# Altium PCB Nixie_clocks_Controls_board.PcbDoc
Units mm, origin at the board's own origin, x right, y up, seen from the top; angles counter-clockwise.
Board outline 65 x 50 mm, 2 copper layers (Top Layer, Bottom Layer), stack 1.671 mm thick; 12 components, 28 nets, 95 pads, 0 vias.
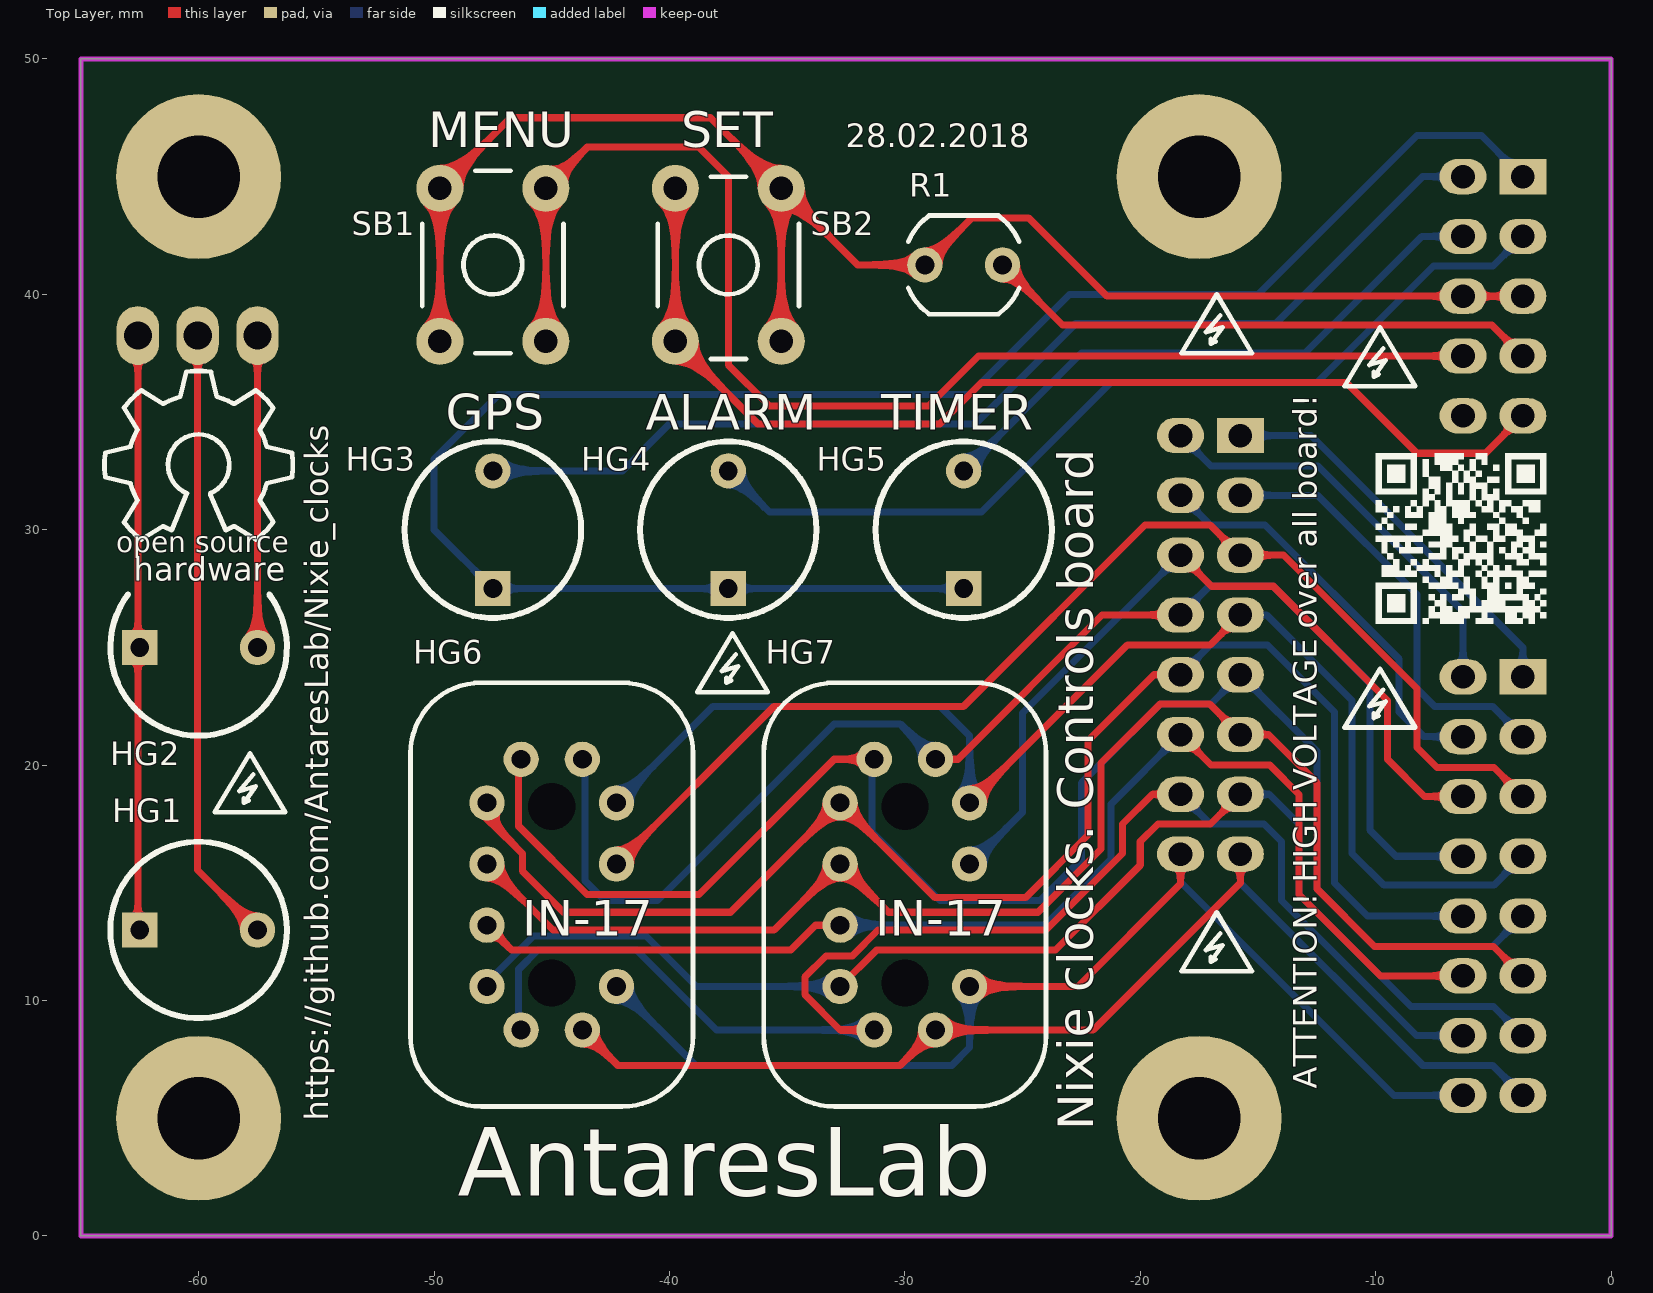
[diagram p0: Top Layer view]
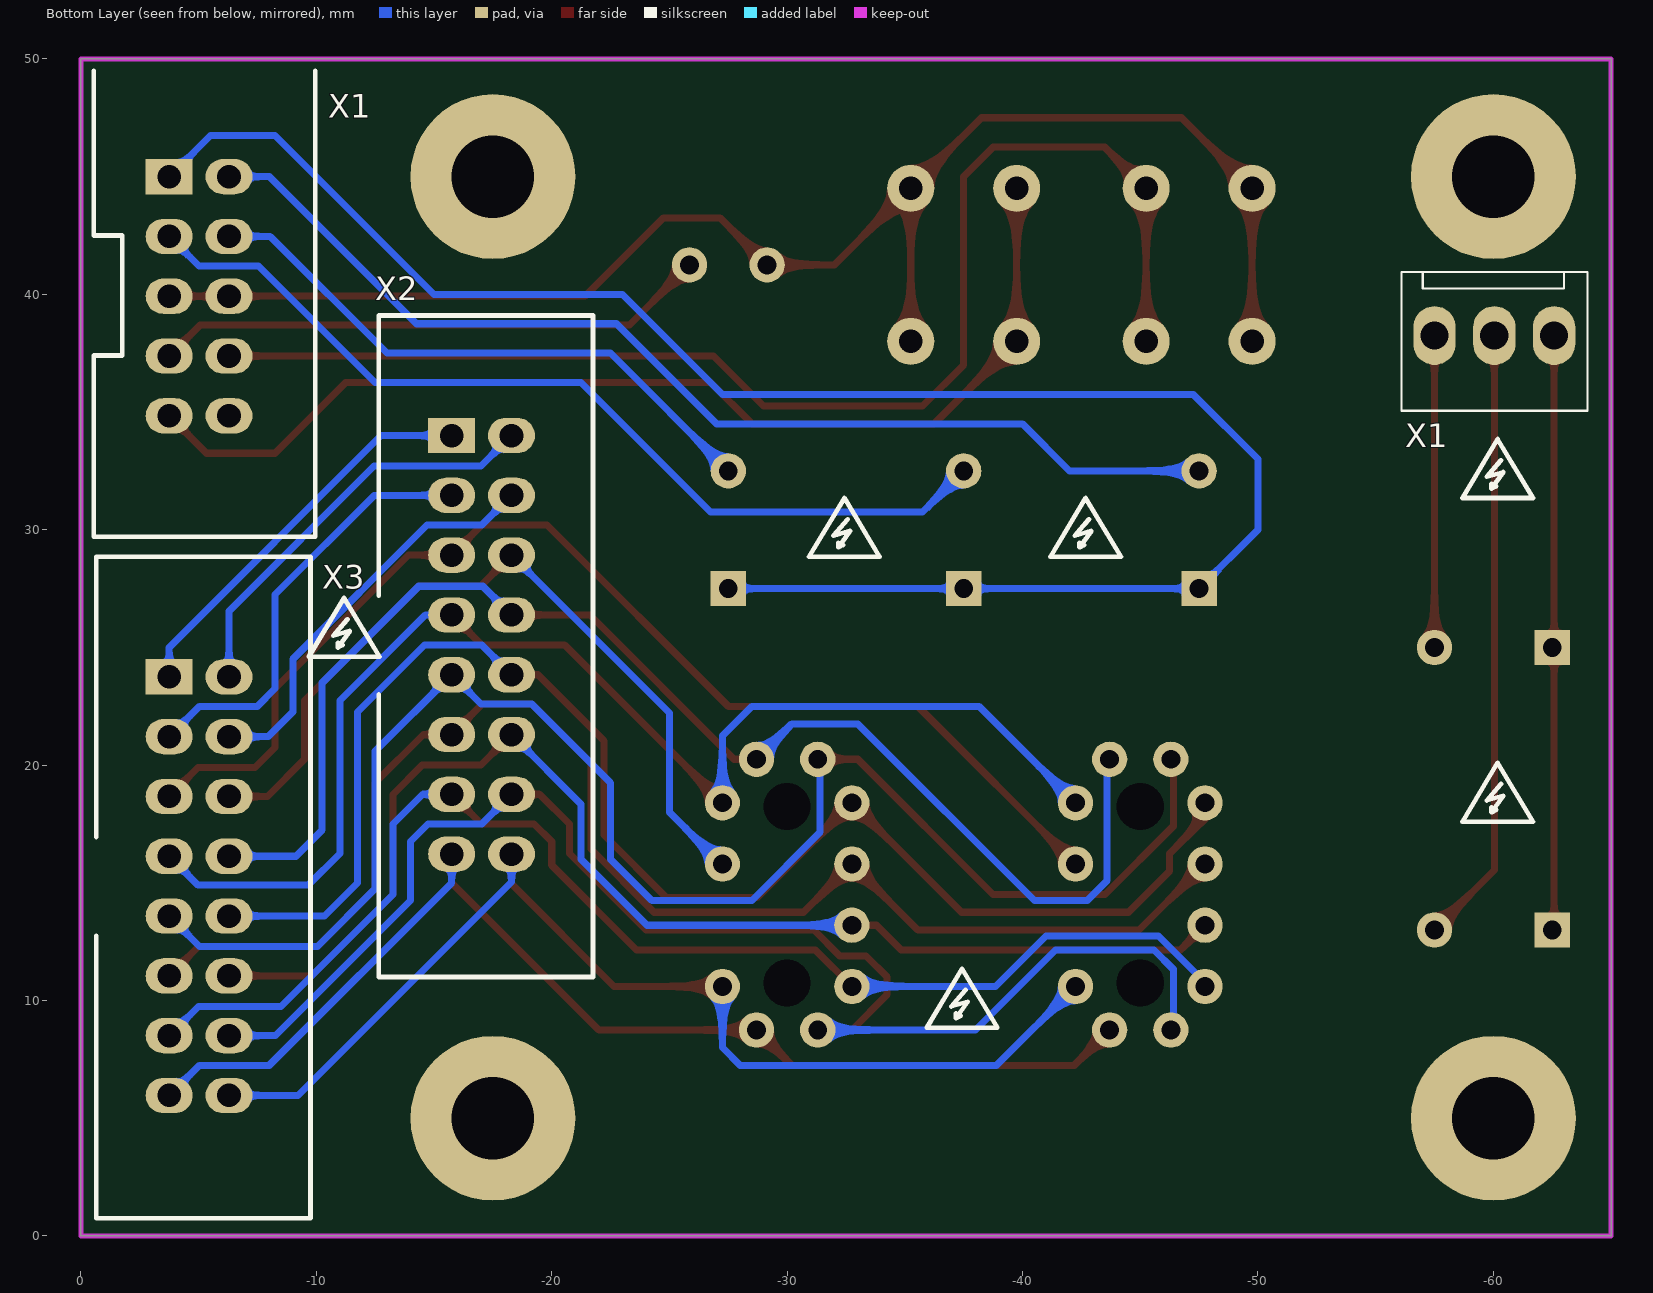
[diagram p1: Bottom Layer view, seen from below]
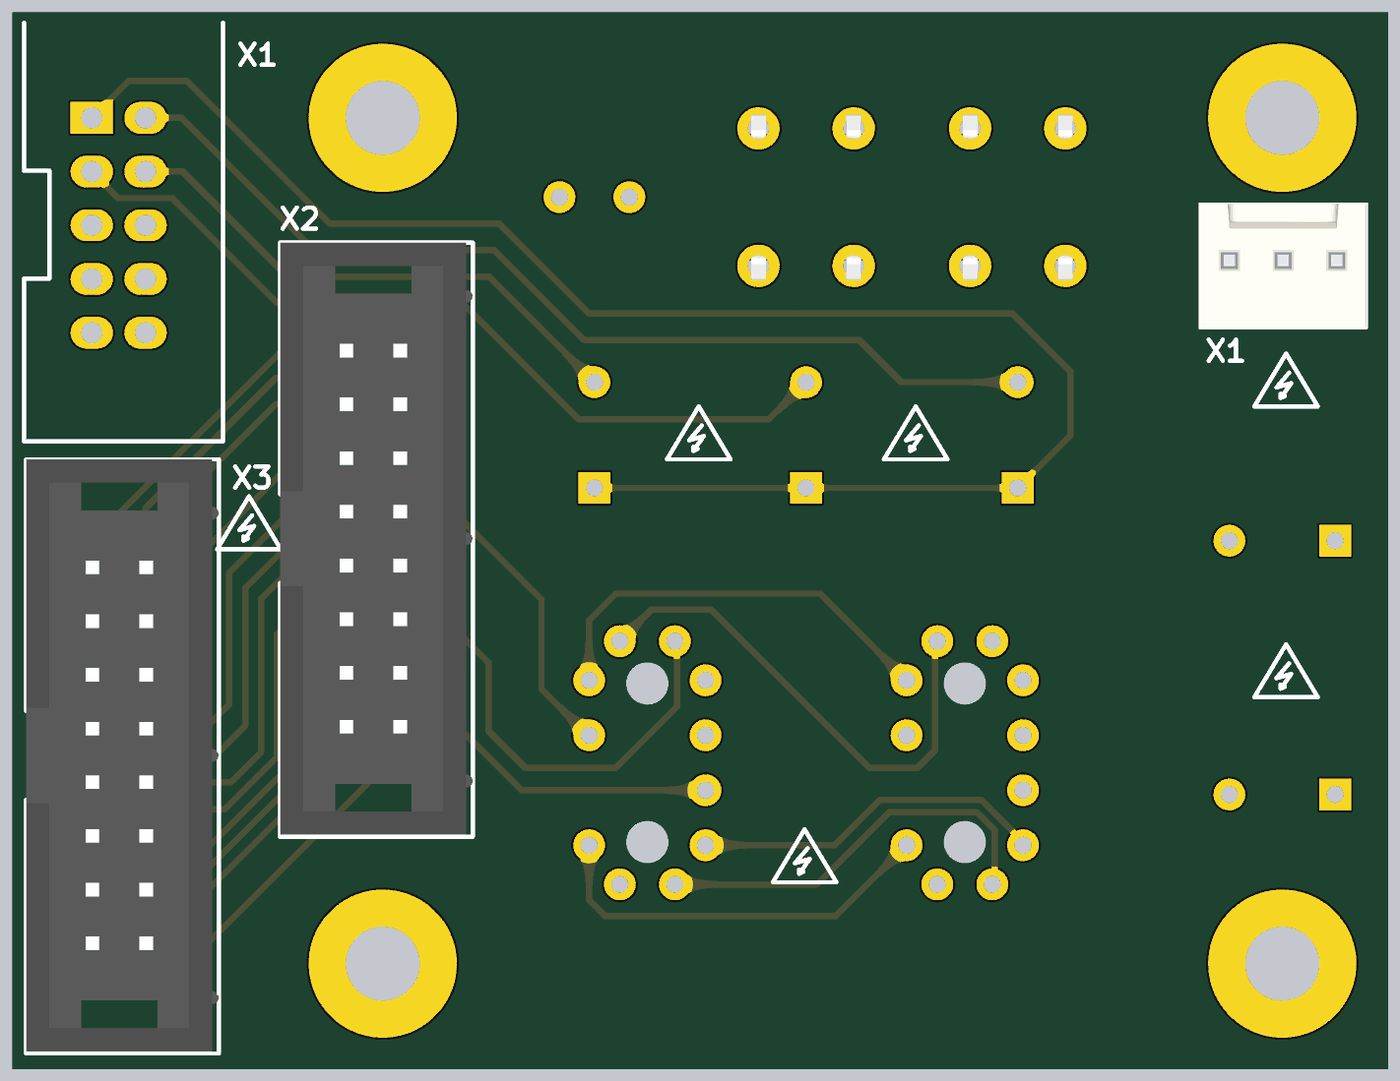
[diagram p2: 3D render of the assembled board from below, using the file's embedded part models]

## Layer stack, top to bottom
Top Solder: solder mask 0.0102, Solder Resist, Dk 3.5
Top Layer: signal copper 0.0356
Dielectric 1: dielectric 1.6, FR-4, Dk 4.8
Bottom Layer: signal copper 0.0356
Bottom Solder: solder mask 0.0102, Solder Resist, Dk 3.5

## Board outline
-65,0 0,0 0,50 -65,50

## Design rules (kind name [scope] priority, off if disabled: settings)
Clearance [All] p1: gap=0.254 ignorepadtopadclearanceinfootprint=FALSE except(0: Arc-Hole Track-Hole SMDPad-Hole THPad-Hole Via-Hole Fill-Hole Poly-Hole Region-Hole Text-Hole)
Height [All] p1: minheight=0 maxheight=30 prefheight=12.7
PolygonConnect [All] p1: connectstyle=Relief reliefconductorwidth=0.254 reliefentries=4 polygonreliefangle="90 Angle" airgapwidth=0.254
RoutingVias [All] p1: holewidth=0.711 width=1.27 viastyle="Through Hole" minholewidth=0.711 minwidth=1.27 maxholewidth=0.711 maxwidth=1.27
SolderMaskExpansion [All] p1: expansion=0.102
Width [All] p1: maxlimit=1 minlimit=0.254 preferedwidth=0.254
29 further rules are at their usual default settings.

## Components (designator, comment, footprint, x,y, rotation, side; value= is the part's Value field where it differs from the comment)
HG1 "INS-1" INS-1 -60,13 r90 top
HG3 "INS-1" INS-1 -47.5,30 r180 top
HG4 "INS-1" INS-1 -37.5,30 r180 top
HG5 "INS-1" INS-1 -27.5,30 r180 top
HG6 "IN-17" IN-17_socket -45,14.5 r0 top
HG7 "IN-17" IN-17_socket -30,14.5 r0 top
R1 "A9950" A99 -27.5,41.25 r180 top
SB1 "SPST_button" TACT-69N-F -47.5,41.25 r90 top
SB2 "SPST_button" TACT-69N-F -37.5,41.25 r270 top
X1 "Points 1" WF-3 -57.5,38.25 r180 bottom
X2 "Tubes" IDC16 -15.75,34 r270 bottom
X3 "Tubes" IDC16 -3.75,23.75 r270 bottom

## Footprints (in the part's own frame and the unit in brackets; to place one, negate y for a bottom-side part, rotate by r counter-clockwise, add the part's x,y. Pads: shape width x height; smd on the part's side, far side on the other; paste and mask are expansions set on the pad)
A99 [mm]
  round 1.5 hole 0.8: 1(-1.65,0) 2(1.65,0)
  silkscreen extent -2.35,-2.1 2.35,2.1, body extent -2.5,-2.1 2.5,2.1, height 2.1
IDC16 [mm]
  rect 1.5x2 hole 1: 1(0,0)
  oval 1.5x2 hole 1: 2(0,2.54) 3(2.54,0) 4(2.54,2.54) 5(5.08,0) 6(5.08,2.54) 7(7.62,0) 8(7.62,2.54) 9(10.16,0) 10(10.16,2.54) 11(12.7,0) 12(12.7,2.54) 13(15.24,0) 14(15.24,2.54) 15(17.78,0) 16(17.78,2.54)
  silkscreen extent -5.1,-3.1 23,6, body extent -5.1,-3.1 22.9,6, height 9.3
IN-17_socket [mm]
  round 1.524 hole 2 unplated: 0(0,-3.75) 0(0,3.75)
  round 1.5 hole 0.8: 1(2.75,1.3) 2(2.75,3.9) 3(1.3,5.75) 4(-1.3,5.75) 5(-2.75,3.9) 6(-2.75,1.3) 7(-2.75,-1.3) 8(-2.75,-3.9) 9(-1.3,-5.75) 10(1.3,-5.75) 11(2.75,-3.9)
  silkscreen extent -6,-9 6,9, body extent -6,-9 6,9, height 8.5
INS-1 [mm]
  rect 1.5x1.5 hole 0.8: 1(0,2.5)
  round 1.5 hole 0.8: 2(0,-2.5)
  silkscreen extent -3.75,-3.75 3.75,3.75, body extent -3.5,-3.5 3.5,3.5, height 28
TACT-69N-F [mm]
  round 2 hole 1: 1(-3.25,2.25) 1(3.25,2.25) 2(-3.25,-2.25) 2(3.25,-2.25)
  silkscreen extent -3.75,-3 4,3, body extent -3.99,-3 3.99,3, height 5.4
WF-3 [mm]
  oval 1.8x2.5 hole 1.2: 1(5.08,0) 2(2.54,0) 3(0,0)
  silkscreen extent -1.4,-3.2 6.5,2.7, body extent -1.36,-3.2 6.44,2.7, height 11.73

## Part data
HG1 HG3 HG4 HG5: "INS-1 neon lamp verticap PCB mounting"
HG6 HG7: "IN-17 PCB nixie tube"
R1: "THT 5mm photoresistor"
SB1 SB2: library part TACT-69N-F, "Tact Button 6x6mm"
X1: library part WF-3, "PCB Connector"
X2 X3: library part IDC-16, "PCB Connector"

## Free pads (board coordinates)
  round 7 hole 3.5: 0(-60,5) 0(-60,45) 0(-17.5,5) 0(-17.5,45)
  rect 1.5x1.5 hole 0.8: 1(-62.5,25)
  rect 2x1.5 hole 1: 1(-3.75,45)
  round 1.5 hole 0.8: 2(-57.5,25)
  oval 2x1.5 hole 1: 2(-6.29,45) 3(-3.75,42.46) 4(-6.29,42.46) 5(-3.75,39.92) 6(-6.29,39.92) 7(-3.75,37.38) 8(-6.29,37.38) 9(-3.75,34.84) 10(-6.29,34.84)

## Nets (pads, with @x,y where several pads share a name; then routed paths per layer and width w, separated by ;. In a path a pad name is that pad's centre, name@x,y a point inside that pad or via, vN(x,y) a via of type N, cw(c..) or ccw(c..) an arc to the next point about the centre after c; other vN are vias at no path point)
Btn_btn: pad.10
GND: pad.5 pad.6 R1.2 SB1.1 SB2.1 | length 65
  Top Layer w0.3: SB1.1@-49.75,38 -49.75,44.5 -46.75,47.5 -38.25,47.5 SB2.1@-35.25,44.5 ; SB2.1@-35.25,38 SB2.1@-35.25,44.5 ; pad.5 -21.42,39.92 -24.75,43.25 -27.15,43.25 R1.2 -32,41.25 SB2.1@-35.25,44.5
HV_A1: X2.1 X3.1 | length 17
  Bottom Layer w0.3: X2.1 -12.75,34 -3.75,25 X3.1
HV_A2: X2.2 X3.2 | length 17.9
  Bottom Layer w0.3: X2.2 -16.99,32.7 -12.45,32.7 -6.29,26.54 X3.2
HV_A3: X2.3 X3.3 | length 18.6
  Bottom Layer w0.3: X2.3 -12.46,31.46 -8.25,27.25 -8.25,23.25 -7.5,22.5 -5.04,22.5 X3.3
HV_A4: X2.4 X3.4 | length 17.6
  Bottom Layer w0.3: X2.4 -17.03,30.2 -14.7,30.2 -9,24.5 -9,22.25 -7.96,21.21 X3.4
HV_A5: HG6.1 X2.5 X3.5 | length 50.7
  Top Layer w0.3: HG6.1 -35.55,22.5 -27.5,22.5 -19.8,30.2 -17.03,30.2 X2.5 -13.92,28.92 -8.25,23.25 -8.25,20.75 -7.4,19.9 -4.98,19.9 X3.5
HV_A6: HG7.1 X2.6 X3.6 | length 34.6
  Top Layer w0.3: X2.6 -16.97,27.6 -14.35,27.6 -9.5,22.75 -9.5,20.25 -7.92,18.67 X3.6
  Bottom Layer w0.3: HG7.1@-27.25,15.75 -25,18 -25,22.21 X2.6
HV_C0: HG6.2 HG7.2 X2.7 X3.7 | length 55.9
  Top Layer w0.3: HG7.2 -20.55,25.1 -17.03,25.1 X2.7
  Bottom Layer w0.3: HG6.2 -38.15,22.5 -28.5,22.5 -27.25,21.25 HG7.2 ; X2.7 -14.63,26.38 -11,22.75 -11,16.25 -9.65,14.9 -4.98,14.9 X3.7
HV_C1: HG6.3 HG7.3 X2.8 X3.8 | length 58.1
  Top Layer w0.3: HG7.3 -27.75,20.25 -21.62,26.38 X2.8
  Bottom Layer w0.3: HG6.3 -43.596,20.25 -43.596,15.096 -42.75,14.25 -40.5,14.25 -33,21.75 -30.2,21.75 HG7.3 ; X2.8 -17.07,27.6 -14.35,27.6 -10.25,23.5 -10.25,17.25 -9.13,16.13 X3.8
HV_C2: HG6.4 HG7.4 X2.9 X3.9 | length 68.2
  Top Layer w0.3: HG6.4 -46.404,20.25 -46.404,17.404 -43.5,14.5 -38.75,14.5 -33,20.25 HG7.4
  Bottom Layer w0.3: HG7.4 -31.404,20.146 -31.404,17.154 -28.5,14.25 -24.25,14.25 -22.5,16 -22.5,19.25 -19.15,22.6 -16.99,22.6 X2.9 -12.5,20.59 -12.5,14.75 -10.05,12.3 -5.04,12.3 X3.9
HV_C3: HG6.5 HG7.5 X2.10 X3.10 | length 63.6
  Top Layer w0.3: HG6.5 -47.75,17.75 -46.25,16.25 -46.25,15.5 -44.5,13.75 -37.4,13.75 HG7.5 -28.72,14.37 -24.88,14.37 -22.216,17.034 -22.216,21.034 -19.41,23.84 X2.10
  Bottom Layer w0.3: X2.10 -17.03,25.1 -14.6,25.1 -11.75,22.25 -11.75,15 -10.34,13.59 X3.10
HV_C4: HG6.6 HG7.6 X2.11 X3.11 | length 60.4
  Top Layer w0.3: HG6.6 -44.95,13 -35.55,13 HG7.6 -30.7,13.75 -24.35,13.75 -21.662,16.438 -21.662,20.088 -19.15,22.6 -17.05,22.6 X2.11 -14.55,21.3 -12.5,19.25 -12.5,14.75 -10.05,12.3 -5,12.3 X3.11
HV_C5: HG6.7 HG7.7 X2.12 X3.12 | length 53.8
  Top Layer w0.3: HG6.7 -46.704,12.154 -34.846,12.154 -33.8,13.2 HG7.7 ; X2.12 -16.99,20 -14.5,20 -13.25,18.75 -13.25,14.5 -9.8,11.05 X3.12
  Bottom Layer w0.3: HG7.7 -24.05,13.2 -21.25,16 -21.25,18.34 X2.12
HV_C6: HG6.8 HG7.8 X2.13 X3.13 | length 55.8
  Top Layer w0.3: HG7.8 -31.196,12.154 -23.596,12.154 -20,15.75 -20,16.75 -19.25,17.5 -17.01,17.5 X2.13
  Bottom Layer w0.3: HG6.8 -47.75,10.769 -45.769,12.75 -41,12.75 -38.85,10.6 HG7.8 ; X2.13 -14.51,18.76 -13.25,17.5 -13.25,14.5 -8.5,9.75 -4.99,9.75 X3.13
HV_C7: HG6.9 HG7.9 X2.14 X3.14 | length 61.4
  Top Layer w0.3: HG7.9 -32.75,8.75 -34.25,10.25 -34.25,11 -33.35,11.9 -32.233,11.9 -31.133,13 -24,13 -20.75,16.25 -20.75,17.5 -19.49,18.76 X2.14
  Bottom Layer w0.3: HG6.9 -46.404,8.854 -46.404,11.332 -45.582,12.154 -41.404,12.154 -38,8.75 HG7.9 ; X2.14 -17.03,17.5 -14.75,17.5 -14,16.75 -14,14.25 -8.26,8.51 X3.14
HV_C8: HG6.10 HG7.10 X2.15 X3.15 | length 50
  Top Layer w0.3: HG6.10 -42.2,7.25 -30.2,7.25 HG7.10 -22,8.75 -15.75,15 X2.15
  Bottom Layer w0.3: X2.15 -15.75,15 -8,7.25 -5.03,7.25 X3.15
HV_C9: HG6.11 HG7.11 X2.16 X3.16 | length 48.3
  Top Layer w0.3: HG7.11 -22.65,10.6 -18.29,14.96 X2.16
  Bottom Layer w0.3: HG6.11 -38.9,7.25 -28,7.25 -27.25,8 HG7.11 ; X2.16 -18.29,15.04 -9.22,5.97 X3.16
HV_P1: HG3.2 pad.2@-6.29,45 | length 46.4
  Bottom Layer w0.3: HG3.2 -42,32.5 -40,34.5 -27,34.5 -22.75,38.75 -14.25,38.75 -8,45 pad.2@-6.29,45
HV_P2: HG4.2 pad.3 | length 39.3
  Bottom Layer w0.3: HG4.2 -35.75,30.75 -26.75,30.75 -21.25,36.25 -12.5,36.25 -7.55,41.2 -5.01,41.2 pad.3
HV_P3: HG5.2 pad.4 | length 25.3
  Bottom Layer w0.3: HG5.2 -22.5,37.5 -13,37.5 -8.04,42.46 pad.4
HV_PA: HG3.1 HG4.1 HG5.1 pad.1@-3.75,45 | length 79.2
  Bottom Layer w0.3: HG5.1 HG4.1 HG3.1 -50,30 -50,33 -47.25,35.75 -27.25,35.75 -23,40 -15,40 -8.25,46.75 -5.5,46.75 pad.1@-3.75,45
Menu_btn: pad.8 SB1.2 | length 56.3
  Top Layer w0.3: SB1.2@-45.25,38 -45.25,44.5 -43.5,46.25 -38.75,46.25 -37.5,45 -37.5,37 -35.75,35.25 -29,35.25 -26.87,37.38 pad.8
NetHG1_1: HG1.1 pad.1@-62.5,25 X1.1 | length 25.2
  Top Layer w0.3: HG1.1@-62.58,13.08 X1.1
NetHG1_2: HG1.2 X1.2 | length 26.3
  Top Layer w0.3: X1.2 -60.04,15.54 HG1.2
NetHG2_2: pad.2@-57.5,25 X1.3 | length 13.2
  Top Layer w0.3: pad.2@-57.5,25 X1.3
Photo: pad.7 R1.1 | length 23.7
  Top Layer w0.3: R1.1 -23.3,38.7 -5.07,38.7 pad.7
Set_btn: pad.9 SB2.2 | length 46.6
  Top Layer w0.3: SB2.2@-39.75,44.5 -39.75,38 -36.25,34.5 -28.5,34.5 -26.75,36.25 -11.25,36.25 -8.25,33.25 -5.34,33.25 pad.9
pads on no net: HG6.0 HG7.0

## Keep-outs
Keep-Out Layer:
  the board outline again, w0.2

## Silkscreen, mask and mechanical layers (free items; w line width, h text height)
Top Overlay:
  drawing of 153 lines, arcs and shapes, not listed
  text "MENU" at -50.25,46.25 h1.52
  text "SET" at -39.5,46.25 h1.52
  text "28.02.2018" at -32.5,46.25 h1
  text "GPS" at -49.5,34.25 h1.52
  text "ALARM" at -41,34.25 h1.52
  text "TIMER" at -31,34.25 h1.52
  text "open source" at -63.5,28.75 h1.5
  text "hardware" at -62.75,27.5 h1.7
  text "HG2" at -63.75,20 h1
  text "ATTENTION! HIGH VOLTAGE over all board!" at -12.5,6.25 h1 r90
  text "https://github.com/AntaresLab/Nixie_clocks" at -54.5,4.9 h1 r90
  text "Nixie clocks. Controls board" at -22,4.5 h1.52 r90
  text "AntaresLab" at -49,0.75 h5
Bottom Overlay:
  lines w0.2: -60.323,19.2 -59.723,18.5 -60.423,18.7 -59.923,18 ; -60.323,32.95 -59.723,32.25 -60.423,32.45 -59.923,31.75 ; -60.123,18.1 -59.923,18 ; -60.123,31.85 -59.923,31.75 ; -59.923,18.2 -59.923,18 ; -59.923,31.95 -59.923,31.75 ; -42.823,30.45 -42.223,29.75 -42.923,29.95 -42.423,29.25 ; -42.623,29.35 -42.423,29.25 ; -42.423,29.45 -42.423,29.25 ; -37.573,10.45 -36.973,9.75 -37.673,9.95 -37.173,9.25 ; -37.373,9.35 -37.173,9.25 ; -37.173,9.45 -37.173,9.25 ; -32.573,30.45 -31.973,29.75 -32.673,29.95 -32.173,29.25 ; -32.373,29.35 -32.173,29.25 ; -32.173,29.45 -32.173,29.25 ; -11.323,26.2 -10.723,25.5 -11.423,25.7 -10.923,25 ; -11.123,25.1 -10.923,25 ; -10.923,25.2 -10.923,25 ; -9.95,49.5 -9.95,29.7 -0.55,29.7 -0.55,37.4 -1.75,37.4 -1.75,42.5 -0.55,42.5 -0.55,49.5 ; -61.68,17.6 -60.18,20.1 -58.68,17.6 -61.68,17.6 ; -61.68,31.35 -60.18,33.85 -58.68,31.35 -61.68,31.35 ; -44.18,28.85 -42.68,31.35 -41.18,28.85 -44.18,28.85 ; -38.93,8.85 -37.43,11.35 -35.93,8.85 -38.93,8.85 ; -33.93,28.85 -32.43,31.35 -30.93,28.85 -33.93,28.85 ; -12.68,24.6 -11.18,27.1 -9.68,24.6 -12.68,24.6
  text "X1" at -10.5,47.5 h1